# EAGLE board base1 (EAGLE 7.2.0)

Size 101.02 x 80.07 mm. Coordinates in mm from the lower left corner, seen from the top.
Outline: 101.02,80.07 100,0 0,0 1.02,80.07
Outline: 45.63,11.84 73.33,11.95 73.28,55.43 45.57,55.29 45.63,11.84
Copper layers (1*16): Top 0.035mm / dielectric 1.5mm / Bottom 0.035mm
Design rules "default": minimum track width 10mil, minimum drill 24mil, track to track 8mil, track to pad 8mil, pad to pad 8mil, via to via 8mil, smd to smd 8mil, copper to edge 40mil, drill to drill 8mil, minimum pad ring 10mil, minimum via ring 8mil, stop-mask expansion 4mil, vias tented up to drill 0mil, thermal gap 10mil
Holes 3.2 mm at 47.71,14.03 71.09,13.94 71.35,53.37
Holes 2.8 mm at 47.39,53.46

## Footprints (pad centres in the part's own frame; a part is rotated, then mirrored left to right if it is on the bottom)
0603-CAP = smd 1 x 1: 1 -0.8,0; 2 0.8,0
0805 = smd 0.8 x 1.2: 1 -0.9,0; 2 0.9,0
EIA3216 = smd 1.4 x 1.6: A 1.4,0; C -1.4,0
0402-CAP = smd 0.7 x 0.9: 1 -0.65,0; 2 0.65,0
0805-NO = smd 1.3 x 1.5: 1 -0.95,0; 2 0.95,0
TSOT25 = smd 0.55 x 1.2: 1 -0.95,-1.3; 2 0,-1.3; 3 0.95,-1.3; 4 0.95,1.3; 5 -0.95,1.3
SMD1,27-2,54 = smd 1.27 x 2.54: 1 0,0
IBGA52 = smd 0.5 x 0.5: A1 -3.5,3.5; A2 -2.5,3.5; A3 -1.5,3.5; A4 -0.5,3.5; A5 0.5,3.5; A6 1.5,3.5; A7 2.5,3.5; A8 3.5,3.5; B1 -3.5,2.5; B2 -2.5,2.5; B3 -1.5,2.5; B4 -0.5,2.5; B5 0.5,2.5; B6 1.5,2.5; B7 2.5,2.5; B8 3.5,2.5; C1 -3.5,1.5; C2 -2.5,1.5; C3 -1.5,1.5; C6 1.5,1.5; C7 2.5,1.5; C8 3.5,1.5; D1 -3.5,0.5; D2 -2.5,0.5; D7 2.5,0.5; D8 3.5,0.5; E1 -3.5,-0.5; E2 -2.5,-0.5; E7 2.5,-0.5; E8 3.5,-0.5; F1 -3.5,-1.5; F2 -2.5,-1.5; F3 -1.5,-1.5; F6 1.5,-1.5; F7 2.5,-1.5; F8 3.5,-1.5; G1 -3.5,-2.5; G2 -2.5,-2.5; G3 -1.5,-2.5; G4 -0.5,-2.5; G5 0.5,-2.5; G6 1.5,-2.5; G7 2.5,-2.5; G8 3.5,-2.5; H1 -3.5,-3.5; H2 -2.5,-3.5; H3 -1.5,-3.5; H4 -0.5,-3.5; H5 0.5,-3.5; H6 1.5,-3.5; H7 2.5,-3.5; H8 3.5,-3.5
1X02_ROUND = drill 1 pad 1.778: 1 -1.27,0; 2 1.27,0
0603 = smd 1 x 1: 1 -0.8,0; 2 0.8,0
1007 = smd 2 x 0.8: 1 0,1; 2 0,-1
LED-TRICOLOR-SMD-MF = smd 0.7 x 1.2: A 0.7,1.5; B 0.7,-1.5; G -0.7,-1.5; R -0.7,1.5
LED-1206 = smd 1.2 x 1.4: A -1.6,0; C 1.6,0
CHIPLED_0805_NOOUTLINE = smd 1.2 x 1.2: A 0,-1.05; C 0,1.05
SOT23-5 = smd 0.55 x 1.2: 1 -0.95,-1.3; 2 0,-1.3; 3 0.95,-1.3; 4 0.95,1.3; 5 -0.95,1.3
WE-FP-4+ = smd 0.8 x 1.5: 1 -4.3,-3.75; 2 -3.1,-3.75; 3 -1.9,-3.75; 4 -0.7,-3.75; 5 0.5,-3.75; 6 1.7,-3.75; 7 2.9,-3.75; 8 4.1,-3.75; 13 4.1,3.75; 14 2.9,3.75; 15 1.7,3.75; 16 0.5,3.75; 17 -0.7,3.75; 18 -1.9,3.75 | smd 1.5 x 0.8: 9 5.75,-1.8; 10 5.75,-0.6; 11 5.75,0.6; 12 5.75,1.8 | smd 0.8 x 0.8: B1 1.7,-1.8; B2 2.9,-1.8; B3 4.1,-1.8; B4 4.1,-0.6; B5 4.1,0.6; B6 4.1,1.8
TAG_TC2030-IDC-NL = smd 0.787 x 0.787: 1 -1.27,-0.635; 2 -1.27,0.635; 3 0,-0.635; 4 0,0.635; 5 1.27,-0.635; 6 1.27,0.635 | hole 0.991: -2.54,0; 2.54,1.016; 2.54,-1.016
SOT23-3 = smd 0.8 x 0.9: 1 -0.95,-1; 2 0.95,-1; 3 0,1.1
0603-RES = smd 1.1 x 1: 1 -0.85,0; 2 0.85,0
EXBV8V = smd 0.45 x 0.7: 1 -1.2,-0.775; 2 -0.4,-0.775; 3 0.4,-0.775; 4 1.2,-0.775; 5 1.2,0.775; 6 0.4,0.775; 7 -0.4,0.775; 8 -1.2,0.775
SOLDERJUMPER_ARROW_NOPASTE = smd 0.762 x 1.524: 1 -1.016,0; 2 1.016,0
MA03-1 = drill 1.016 long: 1 -2.54,0; 2 0,0; 3 2.54,0
LQFP100 = smd 0.9 x 0.3: 1 -7.72,6; 2 -7.72,5.5; 3 -7.72,5; 4 -7.72,4.5; 5 -7.72,4; 6 -7.72,3.5; 7 -7.72,3; 8 -7.72,2.5; 9 -7.72,2; 10 -7.72,1.5; 11 -7.72,1; 12 -7.72,0.5; 13 -7.72,0; 14 -7.72,-0.5; 15 -7.72,-1; 16 -7.72,-1.5; 17 -7.72,-2; 18 -7.72,-2.5; 19 -7.72,-3; 20 -7.72,-3.5; 21 -7.72,-4; 22 -7.72,-4.5; 23 -7.72,-5; 24 -7.72,-5.5; 25 -7.72,-6; 51 7.72,-6; 52 7.72,-5.5; 53 7.72,-5; 54 7.72,-4.5; 55 7.72,-4; 56 7.72,-3.5; 57 7.72,-3; 58 7.72,-2.5; 59 7.72,-2; 60 7.72,-1.5; 61 7.72,-1; 62 7.72,-0.5; 63 7.72,0; 64 7.72,0.5; 65 7.72,1; 66 7.72,1.5; 67 7.72,2; 68 7.72,2.5; 69 7.72,3; 70 7.72,3.5; 71 7.72,4; 72 7.72,4.5; 73 7.72,5; 74 7.72,5.5; 75 7.72,6 | smd 0.3 x 0.9: 26 -6,-7.72; 27 -5.5,-7.72; 28 -5,-7.72; 29 -4.5,-7.72; 30 -4,-7.72; 31 -3.5,-7.72; 32 -3,-7.72; 33 -2.5,-7.72; 34 -2,-7.72; 35 -1.5,-7.72; 36 -1,-7.72; 37 -0.5,-7.72; 38 0,-7.72; 39 0.5,-7.72; 40 1,-7.72; 41 1.5,-7.72; 42 2,-7.72; 43 2.5,-7.72; 44 3,-7.72; 45 3.5,-7.72; 46 4,-7.72; 47 4.5,-7.72; 48 5,-7.72; 49 5.5,-7.72; 50 6,-7.72; 76 6,7.72; 77 5.5,7.72; 78 5,7.72; 79 4.5,7.72; 80 4,7.72; 81 3.5,7.72; 82 3,7.72; 83 2.5,7.72; 84 2,7.72; 85 1.5,7.72; 86 1,7.72; 87 0.5,7.72; 88 0,7.72; 89 -0.5,7.72; 90 -1,7.72; 91 -1.5,7.72; 92 -2,7.72; 93 -2.5,7.72; 94 -3,7.72; 95 -3.5,7.72; 96 -4,7.72; 97 -4.5,7.72; 98 -5,7.72; 99 -5.5,7.72; 100 -6,7.72
PLASTIC_CAMERA = drill 2.2: P$1 -9.906,0.762; P$2 11.049,0.762
USB_TYPE_C_DS_2 = smd 0.25 x 4: A1 2.75,-2.45; A4 1.25,-2.45; A9 -1.25,-2.45; A12 -2.75,-2.45 | smd 0.25 x 3.5: A2 2.25,-2.7; A3 1.75,-2.7; A5 0.75,-2.7; A6 0.25,-2.7; A7 -0.25,-2.7; A8 -0.75,-2.7; A10 -1.75,-2.7; A11 -2.25,-2.7 | smd 0.25 x 4 bottom: B1 -2.75,-2.45; B4 -1.25,-2.45; B9 1.25,-2.45; B12 2.75,-2.45 | smd 0.25 x 3.5 bottom: B2 -2.25,-2.7; B3 -1.75,-2.7; B5 -0.75,-2.7; B6 -0.25,-2.7; B7 0.25,-2.7; B8 0.75,-2.7; B10 1.75,-2.7; B11 2.25,-2.7
CRYSTAL-2.5X2.0 = smd 1 x 0.9: 1 -0.95,-0.8; 2 0.9,-0.8; 3 0.9,0.75; 4 -0.95,0.75

## Placement (x,y rotation side)
C1  1uF  [0603-CAP]  56.68,43.49 270 bottom
C2  22uF  [0805]  51.43,21.24 180 bottom
C3  10uF  [0805]  67.77,21.09 90 top
C4  1uF  [0603-CAP]  69.15,28.55 180 bottom
C5  0.1uF  [0603-CAP]  69.14,27.05 180 bottom
C6  0.1uF  [0603-CAP]  69.11,25.55 180 bottom
C7  0.1uF  [0603-CAP]  65.32,17.48 0 top
C8  0.1uF  [0603-CAP]  64.22,21.36 180 bottom
C9  0.1uF  [0603-CAP]  64.22,22.83 180 bottom
C11  47uF  [EIA3216]  70.51,45.07 270 bottom
C12  10uF  [0805]  67.79,18.19 270 top
C13  0.1uF  [0603-CAP]  64.22,24.3 180 bottom
C14  22uF  [0805]  71.04,25.19 270 top
C16  0.1uF  [0402-CAP]  69.13,29.67 180 top
C17  0.1uF  [0402-CAP]  69.14,28.41 180 top
C18  22uF  [0805]  71.03,28.09 90 top
C19  0.1uF  [0402-CAP]  69.13,27.13 180 top
C20  0.1uF  [0402-CAP]  69.13,25.86 180 top
C21  10µF  [0805-NO]  64.21,46.44 270 top
C22  10µF  [0805-NO]  56.16,43.92 0 top
C40  12pF  [0603-CAP]  67.27,44.71 180 bottom
C41  12pF  [0603-CAP]  67.29,43.17 180 bottom
C44  22uF  [0805]  48.39,28.93 180 bottom
C48  2.2uF  [0603-CAP]  50.01,38.49 90 bottom
C49  2.2uF  [0603-CAP]  54.52,24.47 0 bottom
CONVERTER  PAM2305AABADJ  [TSOT25]  48.41,26.19 180 bottom
GND  [SMD1,27-2,54]  71.75,48.84 270 top
IMAGE_SENSOR  MT9V022  [IBGA52]  58.57,32.99 90 top
JP4  [1X02_ROUND]  63.16,50.14 180 bottom
L1  MPZ1608S181ATAH0  [0603]  69.15,30.05 180 bottom
L3  4.7uH/1.4A  [1007]  48.4,23.19 270 bottom
L4  MPZ1608S181ATAH0  [0603]  68.76,24.47 0 top
LED1  LED-TRICOLOR  [LED-TRICOLOR-SMD-MF]  70.06,40.51 90 top
LED2  VSMY12850  [LED-1206]  47.38,41.94 270 top
LED3  VSMY12850  [LED-1206]  49.23,41.93 90 top
LED4  RED  [CHIPLED_0805_NOOUTLINE]  62.6,46.5 180 top
LED5  GREEN  [CHIPLED_0805_NOOUTLINE]  52.62,43.76 270 top
LIPOCHARGER  MCP73831T-2ACI/OT  [SOT23-5]  56.32,46.68 270 top
MOD1  WIRL-BTLE_2611011024000  [WE-FP-4+]  52.52,18.43 90 top
PROGRAMMING_PINS  TC2030-IDC-NL  [TAG_TC2030-IDC-NL]  60.41,19.48 270 top
Q1  BSS138  [SOT23-3]  48.24,47.48 180 top
R1  10R  [0603-RES]  48.24,45.03 0 top
R2  10K  [0603-RES]  48.25,49.82 0 top
R3  470  [0805-NO]  60.97,46.47 90 top
R4  470  [0805-NO]  59.22,46.47 90 top
R5  100K  [0603-RES]  52.17,23.67 90 bottom
R6  10K\  [0805-NO]  52.56,45.4 0 top
R7  2.5K  [0805-NO]  52.55,47.16 0 top
R10  451K6  [0603-RES]  50.66,23.66 90 bottom
REGULATOR  TPS731XX  [SOT23-5]  65.36,20.5 180 top
RN1  220R  [EXBV8V]  70.09,37.22 180 bottom
RN3  10K  [EXBV8V]  54.14,43.42 180 bottom
RN4  10K  [EXBV8V]  61.21,43.38 0 top
SJ1  [SOLDERJUMPER_ARROW_NOPASTE]  53.54,49.22 0 top
SV1  [MA03-1]  54.15,53.39 0 top
U1  STM32H743VIT6  [LQFP100]  59.08,33.63 0 bottom
U$8  PLASTIC_CAMERA  [PLASTIC_CAMERA]  58.56,32.97 0 top
USBC-CONNECTOR  PCB_USB_C_2.0DS_2  [USB_TYPE_C_DS_2]  63.1,51.23 180 top
V_BATT  [SMD1,27-2,54]  71.74,50.35 270 top
Y1  7S-12.000MAHE-T  [CRYSTAL-2.5X2.0]  67.26,47.12 180 bottom

## Library data of the parts
C1-C9 C11-C14 C16-C20 C40 C41 C44 C48 C49 L1 L3 L4 LED1-LED3 Q1 R1 R2 R5 R10 = sfe
C21 C22 JP4 LED4 LED5 LIPOCHARGER R3 R4 R6 R7 = microbuilder
CONVERTER = regulators
GND V_BATT = wirepad
IMAGE_SENSOR = MT9V022
MOD1 = WE_WIRL_Rev13.0; HEIGHT: 2mm; MANUFACTURER: Würth Elektronik; NR: 2611011024000
PROGRAMMING_PINS = TC2030-IDC-NL; AVAILABILITY: Not in stock; CHECK_PRICES: https://www.snapeda.com/parts/TC2030-IDC-NL/Tag-Connect/view-part/?ref=eda; DESCRIPTION: PLUG-OF-NAILS 6-PIN W/O LEGS 8; MF: Tag-Connect; MP: TC2030-IDC-NL; PACKAGE: None; PRICE: None; SNAPEDA_LINK: https://www.snapeda.com/parts/TC2030-IDC-NL/Tag-Connect/view-part/?ref=snap
REGULATOR Y1 = mux
RN1 RN3 RN4 = resistor-dil; OC_FARNELL: unknown; OC_NEWARK: unknown
SJ1 = microbuilder; BOM: EXCLUDE
SV1 = con-lstb; OC_FARNELL: unknown; OC_NEWARK: unknown
U1 = stm32
U$8 = camera_openmv
USBC-CONNECTOR = USB_pcb_connectors

## Nets
BOOT0: RN3.3 U1.94
DAC: U1.29
DCMI_CLK: IMAGE_SENSOR.A5 U1.67
DCMI_D0: IMAGE_SENSOR.A6 U1.63
DCMI_D1: IMAGE_SENSOR.B6 U1.64
DCMI_D2: IMAGE_SENSOR.A7 U1.97
DCMI_D3: IMAGE_SENSOR.A8 U1.98
DCMI_D4: IMAGE_SENSOR.B7 U1.3
DCMI_D5: IMAGE_SENSOR.E1 U1.92
DCMI_D6: IMAGE_SENSOR.F1 U1.4
DCMI_D7: IMAGE_SENSOR.F2 U1.5
DCMI_D8: IMAGE_SENSOR.G1
DCMI_D9: IMAGE_SENSOR.H1
DCMI_HSYNC: IMAGE_SENSOR.H2 U1.28
DCMI_PCLK: IMAGE_SENSOR.B5 U1.30
DCMI_PWDN: IMAGE_SENSOR.F8 RN4.7 U1.88
DCMI_RST: IMAGE_SENSOR.G8 RN4.8 U1.69
DCMI_SCL: IMAGE_SENSOR.H4
DCMI_SDA: IMAGE_SENSOR.G4
DCMI_VSYNC: IMAGE_SENSOR.G2 U1.93
EXPST: U1.55
FREX: U1.56
FS_DM: U1.70
FS_DP: U1.71
GND: C1.2 C2.2 C3.1 C4.2 C5.2 C6.2 C7.2 C8.2 C9.2 C11.C C12.1 C13.2 C14.1 C16.2 C17.2 C18.1 C19.2 C20.2 C21.2 C22.2 C40.1 C41.1 C44.1 C48.2 C49.2 CONVERTER.2 GND.1 IMAGE_SENSOR.B1 IMAGE_SENSOR.C3 IMAGE_SENSOR.C6 IMAGE_SENSOR.C7 IMAGE_SENSOR.F3 IMAGE_SENSOR.F6 IMAGE_SENSOR.H7 JP4.2 LED5.C LIPOCHARGER.2 MOD1.2 MOD1.18 PROGRAMMING_PINS.5 Q1.2 R2.1 R5.1 R6.2 R7.2 REGULATOR.2 RN3.6 RN4.2 SV1.1 U1.10 U1.19 U1.26 U1.49 U1.74 U1.99 USBC-CONNECTOR.A4 USBC-CONNECTOR.A9 USBC-CONNECTOR.B4 USBC-CONNECTOR.B9 Y1.2 Y1.4
GPIO1: U1.84
GPIO2: U1.85
GPIO3: U1.82
GPIOB1: MOD1.B1 SV1.3
GPIOB2: MOD1.B6 SV1.2
I2C1_SCL: U1.95
I2C1_SDA: U1.96
I2C2_SCL: U1.46
I2C2_SDA: U1.47
LED_B: RN1.6 U1.17
LED_G: RN1.7 U1.16
LED_IR: RN1.5 U1.1
LED_R: RN1.8 U1.15
N$1: LED4.C R3.1
N$2: C40.2 U1.13 Y1.3
N$3: LIPOCHARGER.1 R3.2 R4.2
N$4: C41.2 U1.12 Y1.1
N$5: Q1.1 R2.2 RN1.4
N$6: LED1.B RN1.3
N$8: LED1.R RN1.1
N$9: LED1.G RN1.2
N$10: LED3.C R1.2
N$11: C7.1 REGULATOR.4
N$12: C4.1 C5.1 L1.1 U1.20 U1.21
N$13: CONVERTER.4 R5.2 R10.2
N$14: Q1.3 R1.1
N$15: LIPOCHARGER.5 R6.1 SJ1.2
N$16: LED5.A R4.1
N$17: LED2.C LED3.A
N$18: R7.1 SJ1.1
N$19: IMAGE_SENSOR.G7 RN4.5
N$20: IMAGE_SENSOR.H8 RN4.6
N$30: U1.62
N$31: U1.22
N$32: U1.23
N$33: U1.24
N$34: U1.25
NRST: C1.1 RN3.4 U1.14
RAW: C22.1 C44.2 CONVERTER.1 CONVERTER.3 LIPOCHARGER.3 V_BATT.1
RESETB: MOD1.6 PROGRAMMING_PINS.3
SD_CD: U1.81
SDIO_CLK: U1.80
SDIO_CMD: U1.83
SDIO_D0: U1.65
SDIO_D2: U1.78
SDIO_D3: U1.79
SPI2_MISO: U1.53
SPI2_MOSI: U1.54
SPI2_NSS: U1.51
SPI2_SCLK: U1.52
SPI3_MISO: IMAGE_SENSOR.H3 U1.90
SPI3_MOSI: IMAGE_SENSOR.G3 U1.91
SPI3_SCLK: IMAGE_SENSOR.G5
SPI3_SCLK/TRACESWO: U1.89
SPI3_SSEL: IMAGE_SENSOR.G6 U1.77
SW: CONVERTER.5 L3.1
SWCLK: U1.76
SWDCLKB: MOD1.4 PROGRAMMING_PINS.4
SWDIO: PROGRAMMING_PINS.2 U1.72
SWDIOB: MOD1.5
TIM4_CH1: U1.59
TIM4_CH2: U1.60
TIM4_CH3: U1.61
UART2_RX: MOD1.14 U1.87
UART2_TX: MOD1.13 U1.86
VAA: C14.2 C19.1 C20.1 IMAGE_SENSOR.B8 IMAGE_SENSOR.C8 IMAGE_SENSOR.F7 L4.2
VBAT: C2.1 C3.2 C6.1 C8.1 C9.1 C11.A C13.1 C16.1 C17.1 C18.2 IMAGE_SENSOR.A1 IMAGE_SENSOR.A4 IMAGE_SENSOR.B4 IMAGE_SENSOR.E2 IMAGE_SENSOR.H6 L1.2 L3.2 LED1.A LED2.A R10.1 REGULATOR.1 REGULATOR.3 RN3.5 RN4.1 RN4.3 RN4.4 U1.6 U1.11 U1.27 U1.50 U1.75 U1.100
VBUS: U1.68
VCAP1: C49.1 U1.48
VCAP2: C48.1 U1.73
VCC: MOD1.8 PROGRAMMING_PINS.1
VDD: C21.1 JP4.1 LED4.A LIPOCHARGER.4 USBC-CONNECTOR.A1 USBC-CONNECTOR.A12 USBC-CONNECTOR.B1 USBC-CONNECTOR.B12
VDDA: C12.2 L4.1 REGULATOR.5

## Tracks (layer width: path | path; a pad name or v marks a point on that pad's centre or on a via)
BOOT0  (1 unrouted)
DCMI_CLK  (1 unrouted)
DCMI_D0  (1 unrouted)
DCMI_D1  (1 unrouted)
DCMI_D2  (1 unrouted)
DCMI_D3  (1 unrouted)
DCMI_D4  (1 unrouted)
DCMI_D5  (1 unrouted)
DCMI_D6  (1 unrouted)
DCMI_D7  (1 unrouted)
DCMI_HSYNC  (1 unrouted)
DCMI_PCLK  (1 unrouted)
DCMI_PWDN  (2 unrouted)
DCMI_RST  (2 unrouted)
DCMI_VSYNC  (1 unrouted)
GND  (57 unrouted)
GPIOB1  (1 unrouted)
GPIOB2  (1 unrouted)
LED_B  (1 unrouted)
LED_G  (1 unrouted)
LED_IR  (1 unrouted)
LED_R  (1 unrouted)
N$1  (1 unrouted)
N$2  (2 unrouted)
N$3  (2 unrouted)
N$4  (2 unrouted)
N$5  (2 unrouted)
N$6  (1 unrouted)
N$8  (1 unrouted)
N$9  (1 unrouted)
N$10  (1 unrouted)
N$11  (1 unrouted)
N$12  (4 unrouted)
N$13  (2 unrouted)
N$14  (1 unrouted)
N$15  (2 unrouted)
N$16  (1 unrouted)
N$17  (1 unrouted)
N$18  (1 unrouted)
N$19  (1 unrouted)
N$20  (1 unrouted)
NRST  (2 unrouted)
RAW  (5 unrouted)
RESETB  (1 unrouted)
SPI3_MISO  (1 unrouted)
SPI3_MOSI  (1 unrouted)
SPI3_SSEL  (1 unrouted)
SW  (1 unrouted)
SWDCLKB  (1 unrouted)
SWDIO  (1 unrouted)
UART2_RX  (1 unrouted)
UART2_TX  (1 unrouted)
VAA  (6 unrouted)
VBAT  (31 unrouted)
VCAP1  (1 unrouted)
VCAP2  (1 unrouted)
VCC  (1 unrouted)
VDD  (4 unrouted)
VDDA  (2 unrouted)
(copper drawn outside any net)
  shapes: Top area x2